# EAGLE board Plug_pic20pin (EAGLE 5.10)
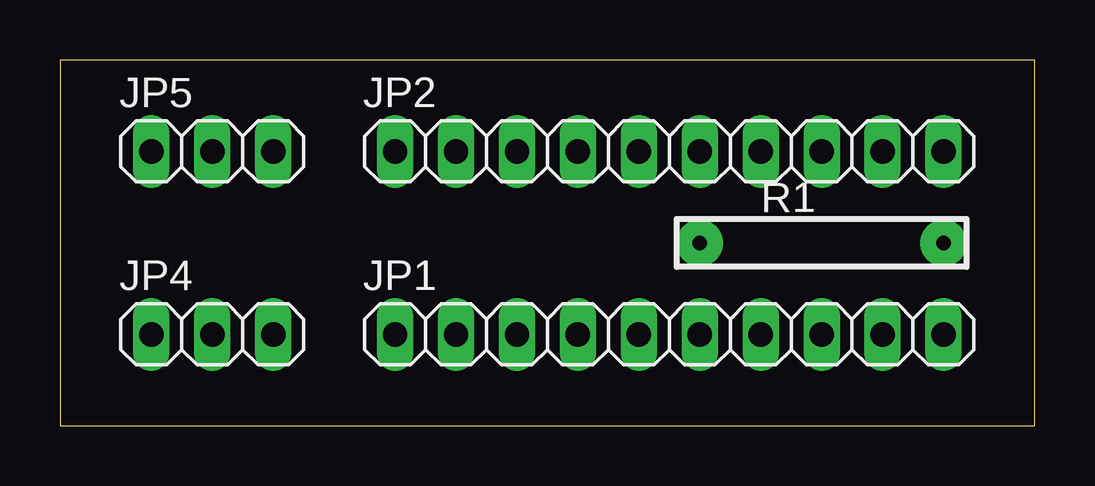
[diagram p0: board, top side]
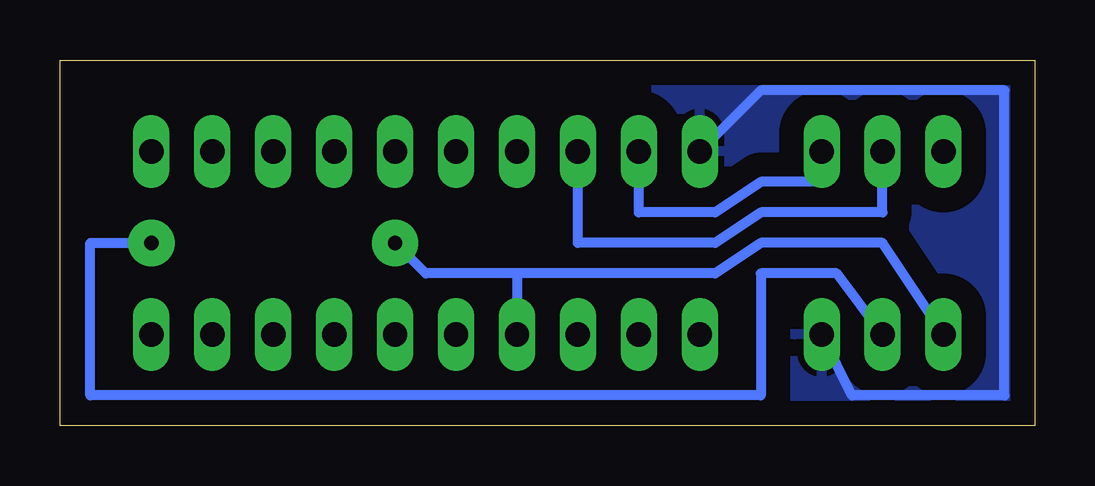
[diagram p1: board, bottom side, seen from below]

Size 40.64 x 15.24 mm. Coordinates in mm from the lower left corner, seen from the top.
Outline: 0,0 40.64,0 40.64,15.24 0,15.24 0,0
Copper layers (1*16): Top 0.035mm / dielectric 1.5mm / Bottom 0.035mm
Design rules "default": minimum track width 10mil, minimum drill 24mil, track to track 8mil, track to pad 8mil, pad to pad 8mil, via to via 8mil, smd to smd 8mil, copper to edge 40mil, drill to drill 8mil, minimum pad ring 10mil, minimum via ring 8mil, stop-mask expansion 4mil, vias tented up to drill 0mil, thermal gap 10mil

## Footprints (pad centres in the part's own frame; a part is rotated, then mirrored left to right if it is on the bottom)
1X10 = drill 1.016 long: 1 -11.43,0; 2 -8.89,0; 3 -6.35,0; 4 -3.81,0; 5 -1.27,0; 6 1.27,0; 7 3.81,0; 8 6.35,0; 9 8.89,0; 10 11.43,0
1X03 = drill 1.016 long: 1 -2.54,0; 2 0,0; 3 2.54,0
R_0.125W_4 = drill 0.6 pad 1.93 round: 1 -5.08,0; 2 5.08,0

## Placement (x,y rotation side)
JP1  [1X10]  25.4,3.81 0 top
JP2  [1X10]  25.4,11.43 0 top
JP4  [1X03]  6.35,3.81 0 top
JP5  [1X03]  6.35,11.43 0 top
R1  10K  [R_0.125W_4]  31.75,7.62 0 top

## Library data of the parts
JP1 JP2 JP4 JP5 = pinheader
R1 = MyLib

## Nets
GND: JP2.1 JP4.3
N$1: JP1.4 JP4.1 R1.1
N$2: JP2.2 JP5.3
N$3: JP2.3 JP5.2
VCC: JP4.2 R1.2

## Tracks (layer width: path | path; a pad name or v marks a point on that pad's centre or on a via)
GND
  Bottom 0.406: JP4.3 7.62,1.27 1.27,1.27 1.27,13.97 11.43,13.97 JP2.1
  pour Bottom (isolate 1.016): 0,15.24 0,0 40.64,0 40.64,15.24
N$1
  Bottom 0.406: JP4.1 6.35,7.62 11.43,7.62 13.34,6.35 21.59,6.35 | 21.59,6.35 JP1.4 | R1.1 25.4,6.35 21.59,6.35
N$2
  Bottom 0.406: JP5.3 8.89,10.16 11.43,10.16 13.34,8.89 16.51,8.89 JP2.2
N$3
  Bottom 0.406: JP5.2 6.35,8.89 11.43,8.89 13.34,7.62 19.05,7.62 JP2.3
VCC
  Bottom 0.406: JP4.2 8.26,6.35 11.43,6.35 11.43,1.27 39.37,1.27 39.37,7.62 R1.2